# EAGLE board tappytap_6x6_connopposite (EAGLE 7.3.0)
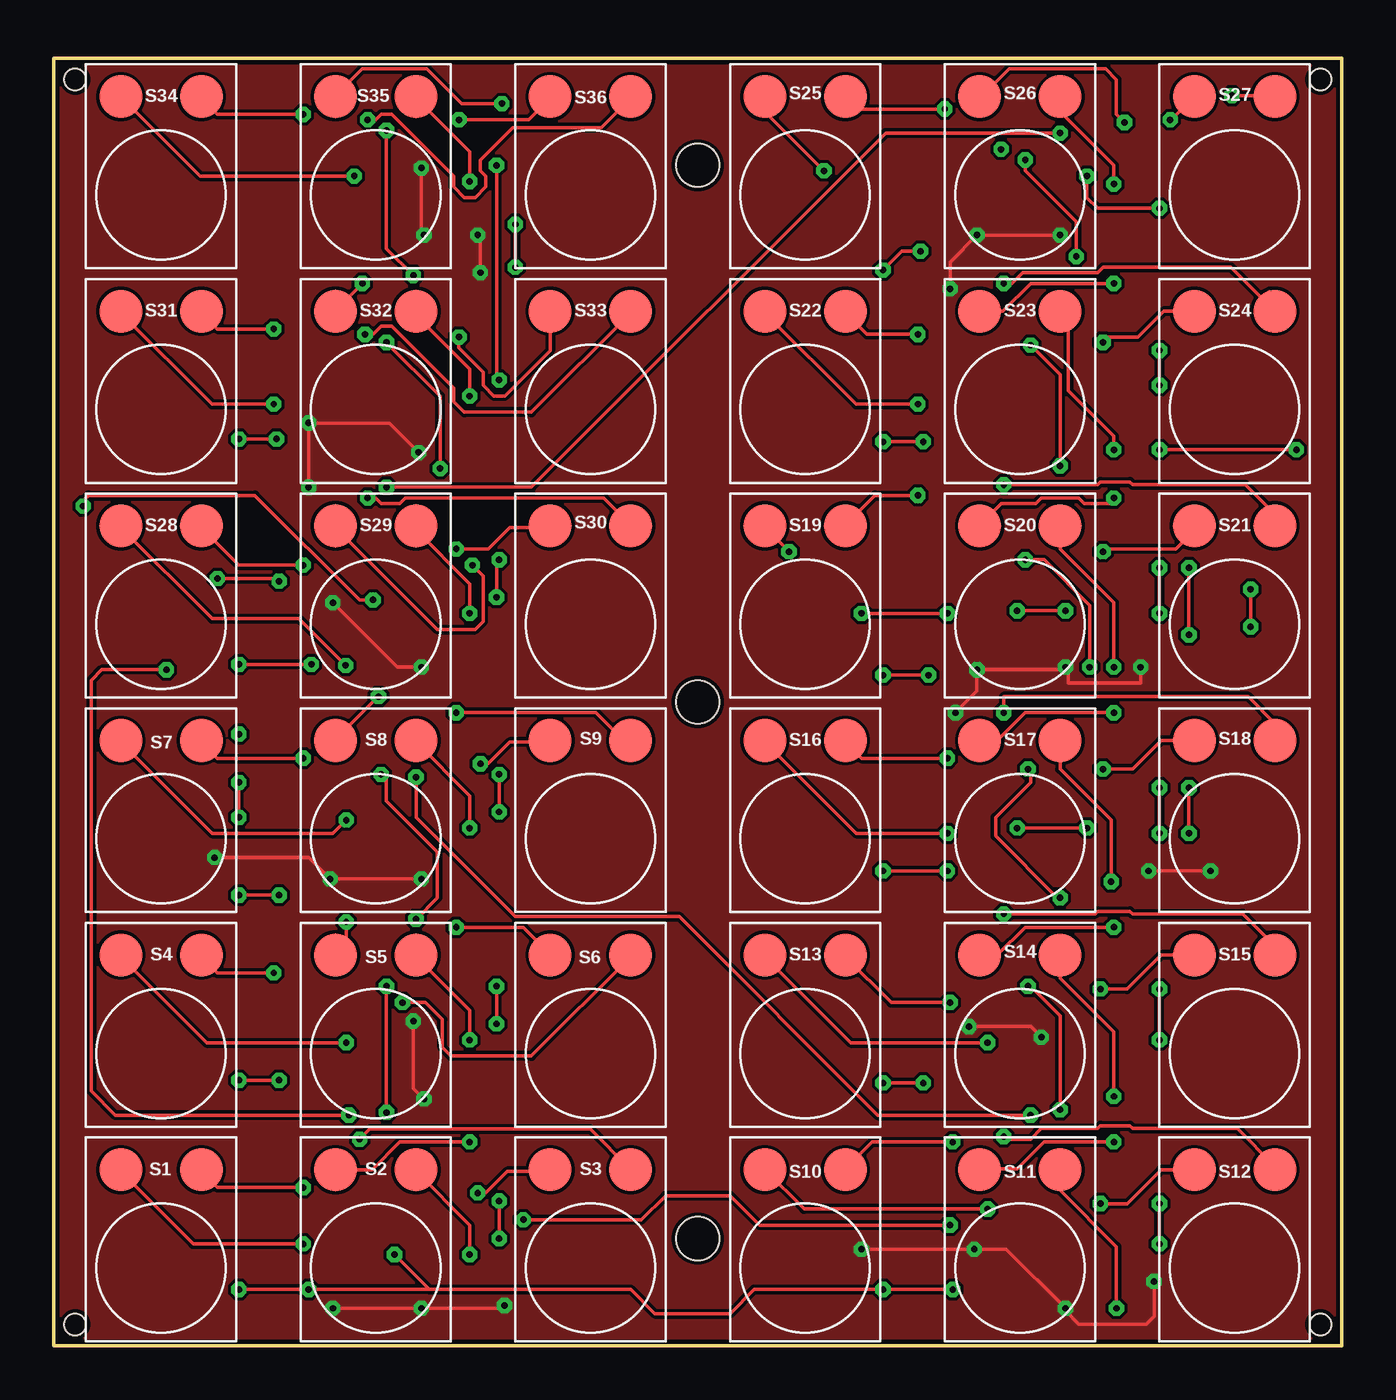
[diagram p0: board, top side]
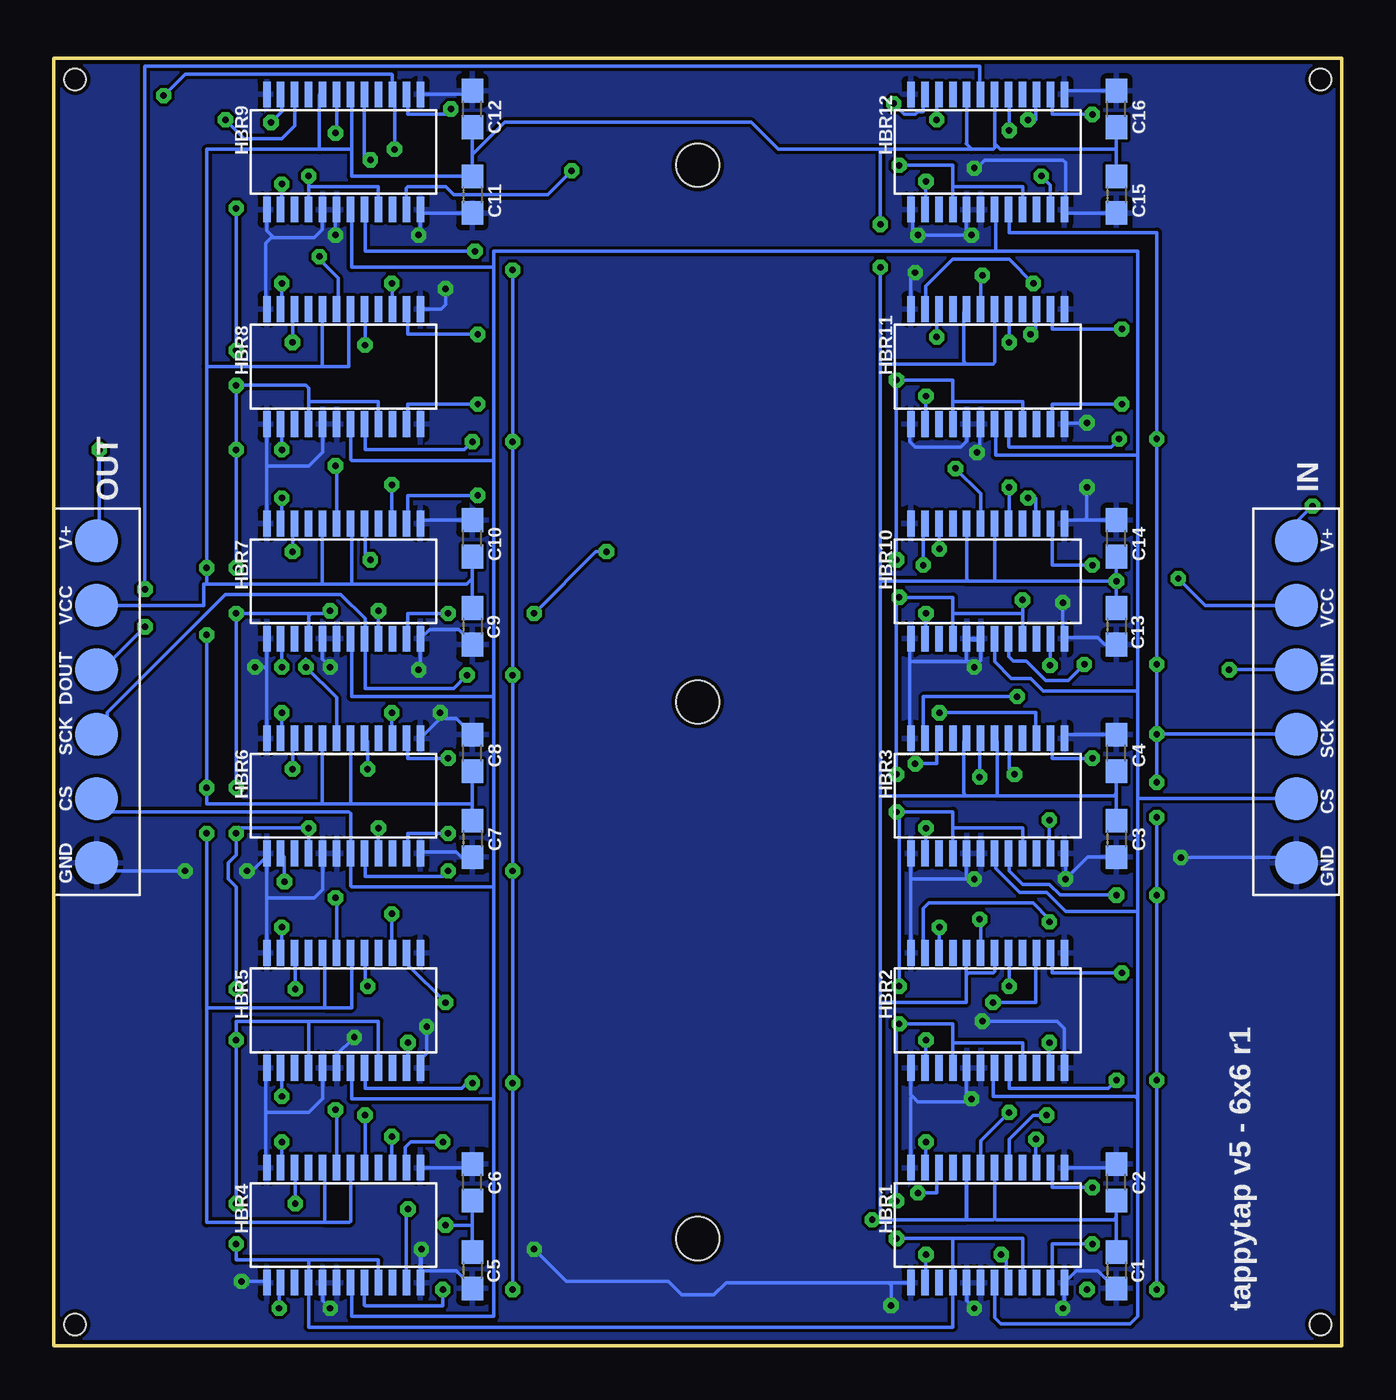
[diagram p1: board, bottom side, seen from below]

Size 60 x 60 mm. Coordinates in mm from the lower left corner, seen from the top.
Outline: 0,0 0,60 60,60 60,0 0,0
Copper layers (1*16): Top 0.035mm / dielectric 1.6mm / Bottom 0.035mm
Design rules "PCBWay *": minimum track width 6mil, minimum drill 0.3mm, track to track 6mil, track to pad 6mil, pad to pad 6mil, via to via 6mil, smd to smd 6mil, copper to edge 8mil, drill to drill 8mil, minimum pad ring 8mil, minimum via ring 8mil, stop-mask expansion 4mil, vias tented up to drill 25mil, thermal gap 10mil
Holes 2 mm at 30,55 30,30 30,5
Holes 1 mm at 1,59 1,1 59,1 59,59

## Footprints (pad centres in the part's own frame; a part is rotated, then mirrored left to right if it is on the bottom)
C0603 = smd 1.1 x 1: 1 -0.85,0; 2 0.85,0
SSOP-24 = smd 1.2 x 0.35: 1 -2.68,3.575; 2 -2.68,2.925; 3 -2.68,2.275; 4 -2.68,1.625; 5 -2.68,0.975; 6 -2.68,0.325; 7 -2.68,-0.325; 8 -2.68,-0.975; 9 -2.68,-1.625; 10 -2.68,-2.275; 11 -2.68,-2.925; 12 -2.68,-3.575; 13 2.68,-3.575; 14 2.68,-2.925; 15 2.68,-2.275; 16 2.68,-1.625; 17 2.68,-0.975; 18 2.68,-0.325; 19 2.68,0.325; 20 2.68,0.975; 21 2.68,1.625; 22 2.68,2.275; 23 2.68,2.925; 24 2.68,3.575
TP6_2MM = smd 2 x 2: P$1 -7.5,0; P$2 -4.5,0; P$3 -1.5,0; P$4 1.5,0; P$5 4.5,0; P$6 7.5,0
TP_6MM_BIG_PAD = smd 2 x 2: P$1 -1.875,-4.58; P$2 1.875,-4.58

## Placement (x,y rotation side)
C1  10uF  [C0603]  10.5,3.52 270 bottom
C2  0.1uF  [C0603]  10.5,7.62 90 bottom
C3  10uF  [C0603]  10.5,23.62 270 bottom
C4  0.1uF  [C0603]  10.5,27.62 90 bottom
C5  10uF  [C0603]  40.5,3.52 270 bottom
C6  0.1uF  [C0603]  40.5,7.62 90 bottom
C7  10uF  [C0603]  40.5,23.62 270 bottom
C8  0.1uF  [C0603]  40.5,27.62 90 bottom
C9  10uF  [C0603]  40.5,33.52 270 bottom
C10  0.1uF  [C0603]  40.5,37.62 90 bottom
C11  10uF  [C0603]  40.5,53.62 270 bottom
C12  0.1uF  [C0603]  40.5,57.62 90 bottom
C13  10uF  [C0603]  10.5,33.52 270 bottom
C14  0.1uF  [C0603]  10.5,37.62 90 bottom
C15  10uF  [C0603]  10.5,53.62 270 bottom
C16  0.1uF  [C0603]  10.5,57.62 90 bottom
HBR1  NCV7718  [SSOP-24]  16.5,5.62 270 bottom
HBR2  NCV7718  [SSOP-24]  16.5,15.62 270 bottom
HBR3  NCV7718  [SSOP-24]  16.5,25.62 270 bottom
HBR4  NCV7718  [SSOP-24]  46.5,5.62 270 bottom
HBR5  NCV7718  [SSOP-24]  46.5,15.62 270 bottom
HBR6  NCV7718  [SSOP-24]  46.5,25.62 270 bottom
HBR7  NCV7718  [SSOP-24]  46.5,35.62 270 bottom
HBR8  NCV7718  [SSOP-24]  46.5,45.62 270 bottom
HBR9  NCV7718  [SSOP-24]  46.5,55.62 270 bottom
HBR10  NCV7718  [SSOP-24]  16.5,35.62 270 bottom
HBR11  NCV7718  [SSOP-24]  16.5,45.62 270 bottom
HBR12  NCV7718  [SSOP-24]  16.5,55.62 270 bottom
IN  TP6  [TP6_2MM]  2.12,30 90 bottom
OUT  TP6  [TP6_2MM]  58,30 270 bottom
S1  TP_6MM_BIG_PAD  [TP_6MM_BIG_PAD]  5,3.62 180 top
S2  TP_6MM_BIG_PAD  [TP_6MM_BIG_PAD]  15,3.62 180 top
S3  TP_6MM_BIG_PAD  [TP_6MM_BIG_PAD]  25,3.62 180 top
S4  TP_6MM_BIG_PAD  [TP_6MM_BIG_PAD]  5,13.62 180 top
S5  TP_6MM_BIG_PAD  [TP_6MM_BIG_PAD]  15,13.62 180 top
S6  TP_6MM_BIG_PAD  [TP_6MM_BIG_PAD]  25,13.62 180 top
S7  TP_6MM_BIG_PAD  [TP_6MM_BIG_PAD]  5,23.62 180 top
S8  TP_6MM_BIG_PAD  [TP_6MM_BIG_PAD]  15,23.62 180 top
S9  TP_6MM_BIG_PAD  [TP_6MM_BIG_PAD]  25,23.62 180 top
S10  TP_6MM_BIG_PAD  [TP_6MM_BIG_PAD]  35,3.62 180 top
S11  TP_6MM_BIG_PAD  [TP_6MM_BIG_PAD]  45,3.62 180 top
S12  TP_6MM_BIG_PAD  [TP_6MM_BIG_PAD]  55,3.62 180 top
S13  TP_6MM_BIG_PAD  [TP_6MM_BIG_PAD]  35,13.62 180 top
S14  TP_6MM_BIG_PAD  [TP_6MM_BIG_PAD]  45,13.62 180 top
S15  TP_6MM_BIG_PAD  [TP_6MM_BIG_PAD]  55,13.62 180 top
S16  TP_6MM_BIG_PAD  [TP_6MM_BIG_PAD]  35,23.62 180 top
S17  TP_6MM_BIG_PAD  [TP_6MM_BIG_PAD]  45,23.62 180 top
S18  TP_6MM_BIG_PAD  [TP_6MM_BIG_PAD]  55,23.62 180 top
S19  TP_6MM_BIG_PAD  [TP_6MM_BIG_PAD]  35,33.62 180 top
S20  TP_6MM_BIG_PAD  [TP_6MM_BIG_PAD]  45,33.62 180 top
S21  TP_6MM_BIG_PAD  [TP_6MM_BIG_PAD]  55,33.62 180 top
S22  TP_6MM_BIG_PAD  [TP_6MM_BIG_PAD]  35,43.62 180 top
S23  TP_6MM_BIG_PAD  [TP_6MM_BIG_PAD]  45,43.62 180 top
S24  TP_6MM_BIG_PAD  [TP_6MM_BIG_PAD]  55,43.62 180 top
S25  TP_6MM_BIG_PAD  [TP_6MM_BIG_PAD]  35,53.62 180 top
S26  TP_6MM_BIG_PAD  [TP_6MM_BIG_PAD]  45,53.62 180 top
S27  TP_6MM_BIG_PAD  [TP_6MM_BIG_PAD]  55,53.62 180 top
S28  TP_6MM_BIG_PAD  [TP_6MM_BIG_PAD]  5,33.62 180 top
S29  TP_6MM_BIG_PAD  [TP_6MM_BIG_PAD]  15,33.62 180 top
S30  TP_6MM_BIG_PAD  [TP_6MM_BIG_PAD]  25,33.62 180 top
S31  TP_6MM_BIG_PAD  [TP_6MM_BIG_PAD]  5,43.62 180 top
S32  TP_6MM_BIG_PAD  [TP_6MM_BIG_PAD]  15,43.62 180 top
S33  TP_6MM_BIG_PAD  [TP_6MM_BIG_PAD]  25,43.62 180 top
S34  TP_6MM_BIG_PAD  [TP_6MM_BIG_PAD]  5,53.62 180 top
S35  TP_6MM_BIG_PAD  [TP_6MM_BIG_PAD]  15,53.62 180 top
S36  TP_6MM_BIG_PAD  [TP_6MM_BIG_PAD]  25,53.62 180 top

## Library data of the parts
C1-C16 = rcl
HBR1-HBR12 IN OUT = Sparky
S1-S36 = tom-tap

## Nets
+5V [usbvcc]: C1.1 C2.1 C3.1 C4.1 C5.1 C6.1 C7.1 C8.1 C9.1 C10.1 C11.1 C12.1 C13.1 C14.1 C15.1 C16.1 HBR1.6 HBR1.8 HBR2.6 HBR2.8 HBR3.6 HBR3.8 HBR4.6 HBR4.8 HBR5.6 HBR5.8 HBR6.6 HBR6.8 HBR7.6 HBR7.8 HBR8.6 HBR8.8 HBR9.6 HBR9.8 HBR10.6 HBR10.8 HBR11.6 HBR11.8 HBR12.6 HBR12.8 IN.P$5 OUT.P$2
GND [gnd]: C1.2 C2.2 C3.2 C4.2 C5.2 C6.2 C7.2 C8.2 C9.2 C10.2 C11.2 C12.2 C13.2 C14.2 C15.2 C16.2 HBR1.1 HBR1.12 HBR1.13 HBR1.17 HBR1.18 HBR1.24 HBR2.1 HBR2.12 HBR2.13 HBR2.17 HBR2.18 HBR2.24 HBR3.1 HBR3.12 HBR3.13 HBR3.17 HBR3.18 HBR3.24 HBR4.1 HBR4.12 HBR4.13 HBR4.17 HBR4.18 HBR4.24 HBR5.1 HBR5.12 HBR5.13 HBR5.17 HBR5.18 HBR5.24 HBR6.1 HBR6.12 HBR6.13 HBR6.17 HBR6.18 HBR6.24 HBR7.1 HBR7.12 HBR7.13 HBR7.17 HBR7.18 HBR7.24 HBR8.1 HBR8.12 HBR8.13 HBR8.17 HBR8.18 HBR8.24 HBR9.1 HBR9.12 HBR9.13 HBR9.17 HBR9.18 HBR9.24 HBR10.1 HBR10.12 HBR10.13 HBR10.17 HBR10.18 HBR10.24 HBR11.1 HBR11.12 HBR11.13 HBR11.17 HBR11.18 HBR11.24 HBR12.1 HBR12.12 HBR12.13 HBR12.17 HBR12.18 HBR12.24 IN.P$1 OUT.P$6
N$1: HBR4.7 HBR5.5
N$2: HBR5.7 HBR6.5
N$3: HBR7.7 HBR8.5
N$4: HBR8.7 HBR9.5
N$5: HBR10.7 HBR11.5
N$6: HBR11.7 HBR12.5
N$24: HBR1.7 HBR2.5
N$26: HBR2.7 HBR3.5
NCV_CS: HBR1.19 HBR2.19 HBR3.19 HBR4.19 HBR5.19 HBR6.19 HBR7.19 HBR8.19 HBR9.19 HBR10.19 HBR11.19 HBR12.19 IN.P$2 OUT.P$5
S1A: HBR1.2 S1.P$1
S1A1: HBR4.2 S10.P$1
S1A2: HBR7.2 S19.P$1
S1A3: HBR10.2 S28.P$1
S1B: HBR1.23 S1.P$2
S1B1: HBR4.23 S10.P$2
S1B2: HBR7.23 S19.P$2
S1B3: HBR10.23 S28.P$2
S2A: HBR1.14 S2.P$1
S2A1: HBR4.14 S11.P$1
S2A2: HBR7.14 S20.P$1
S2A3: HBR10.14 S29.P$1
S2B: HBR1.11 S2.P$2
S2B1: HBR4.11 S11.P$2
S2B2: HBR7.11 S20.P$2
S2B3: HBR10.11 S29.P$2
S3A: HBR1.3 S3.P$1
S3A1: HBR4.3 S12.P$1
S3A2: HBR7.3 S21.P$1
S3A3: HBR10.3 S30.P$1
S3B: HBR1.10 S3.P$2
S3B1: HBR4.10 S12.P$2
S3B2: HBR7.10 S21.P$2
S3B3: HBR10.10 S30.P$2
S4A: HBR2.2 S4.P$1
S4A1: HBR5.2 S13.P$1
S4A2: HBR8.2 S22.P$1
S4A3: HBR11.2 S31.P$1
S4B: HBR2.23 S4.P$2
S4B1: HBR5.23 S13.P$2
S4B2: HBR8.23 S22.P$2
S4B3: HBR11.23 S31.P$2
S5A: HBR2.14 S5.P$1
S5A1: HBR5.14 S14.P$1
S5A2: HBR8.14 S23.P$1
S5A3: HBR11.14 S32.P$1
S5B: HBR2.11 S5.P$2
S5B1: HBR5.11 S14.P$2
S5B2: HBR8.11 S23.P$2
S5B3: HBR11.11 S32.P$2
S6A: HBR2.3 S6.P$1
S6A1: HBR5.3 S15.P$1
S6A2: HBR8.3 S24.P$1
S6A3: HBR11.3 S33.P$1
S6B: HBR2.10 S6.P$2
S6B1: HBR5.10 S15.P$2
S6B2: HBR8.10 S24.P$2
S6B3: HBR11.10 S33.P$2
S7A: HBR3.2 S7.P$1
S7A1: HBR6.2 S16.P$1
S7A2: HBR9.2 S25.P$1
S7A3: HBR12.2 S34.P$1
S7B: HBR3.23 S7.P$2
S7B1: HBR6.23 S16.P$2
S7B2: HBR9.23 S25.P$2
S7B3: HBR12.23 S34.P$2
S8A: HBR3.14 S8.P$1
S8A1: HBR6.14 S17.P$1
S8A2: HBR9.14 S26.P$1
S8A3: HBR12.14 S35.P$1
S8B: HBR3.11 S8.P$2
S8B1: HBR6.11 S17.P$2
S8B2: HBR9.11 S26.P$2
S8B3: HBR12.11 S35.P$2
S9A: HBR3.3 S9.P$1
S9A1: HBR6.3 S18.P$1
S9A2: HBR9.3 S27.P$1
S9A3: HBR12.3 S36.P$1
S9B: HBR3.10 S9.P$2
S9B1: HBR6.10 S18.P$2
S9B2: HBR9.10 S27.P$2
S9B3: HBR12.10 S36.P$2
SCK: HBR1.20 HBR2.20 HBR3.20 HBR4.20 HBR5.20 HBR6.20 HBR7.20 HBR8.20 HBR9.20 HBR10.20 HBR11.20 HBR12.20 IN.P$3 OUT.P$4
SI_1: HBR1.5 IN.P$4
SO_1: HBR3.7 HBR4.5
SO_2: HBR6.7 HBR7.5
SO_3: HBR9.7 HBR10.5
SO_4: HBR12.7 OUT.P$3
V+: HBR1.16 HBR1.21 HBR2.16 HBR2.21 HBR3.16 HBR3.21 HBR4.16 HBR4.21 HBR5.16 HBR5.21 HBR6.16 HBR6.21 HBR7.16 HBR7.21 HBR8.16 HBR8.21 HBR9.16 HBR9.21 HBR10.16 HBR10.21 HBR11.16 HBR11.21 HBR12.16 HBR12.21 IN.P$6 OUT.P$1

## Tracks (layer width: path | path; a pad name or v marks a point on that pad's centre or on a via)
+5V  (via drill 0.3)
  Top 0.152: v7.62,35.75 10.38,35.75 v10.5,35.62 | v21.5,52.25 v21.5,50.25 | v52.88,36.25 v52.88,33.12 | v52.88,23.88 v52.88,26 | v41.75,5.62 32.88,5.62 31.5,7 28.5,7 27.38,5.88 v21.88,5.88
  Bottom 0.152: 10.5,55.75 C15.1 | v10.5,35.62 C13.1 | C4.1 10.5,25.75 | 10.5,25.75 C3.1 | C1.1 C2.1 10.5,6 10.62,5.88 16.1,5.88 16.18,5.95 | C6.1 40.5,5.62 | 40.5,5.62 C5.1 | 40.5,25.25 C7.1 | C10.1 40.5,35.75 | 40.5,35.75 C9.1 | C12.1 40.5,55.5 | 40.5,55.5 40.5,54.5 | 40.5,54.5 C11.1 40.52,54.5 | IN.P$5 6.38,34.5 v7.62,35.75 | v10.5,35.62 C14.1 | HBR10.6 16.18,35.7 16.25,35.62 | 17.38,35.62 16.25,35.62 | 16.25,35.62 v10.5,35.62 | 21.5,45.75 21.5,35.62 | 21.5,35.62 21.5,25.62 | 17.5,28.28 HBR3.8 17.62,28.16 17.62,25.75 17.5,25.62 | 16.12,25.62 10.62,25.62 10.5,25.75 | 16.12,25.62 16.05,25.68 16.05,28.18 HBR3.6 | 16.12,25.62 17.5,25.62 | 17.5,25.62 21.5,25.62 | 21.5,25.62 21.5,16 | 21.5,16 17.5,16 17.5,17.25 | 17.5,17.25 17.5,18.28 HBR2.8 | HBR1.6 16.18,5.95 | 16.18,5.95 16.25,5.88 17.5,5.88 | 17.5,5.88 17.5,8.28 HBR1.8 17.48,5.9 17.5,5.88 | 17.5,45.75 16.25,45.75 16.18,45.83 HBR11.6 | 17.5,45.75 17.62,45.88 17.62,48.16 HBR11.8 | 17.5,45.75 21.5,45.75 | HBR12.6 16.18,56 | 16.18,56 16.18,55.83 16.25,55.75 17.25,55.75 | 17.25,55.75 17.5,56 17.48,56.02 HBR12.8 | C16.1 10.5,55.75 | 10.5,55.75 15.93,55.75 16.18,56 | 17.25,55.75 21.5,55.75 | 21.5,55.75 v21.5,52.25 | v21.5,50.25 21.5,45.75 | OUT.P$2 53,34.5 53,35.5 52.88,35.5 | 47.5,35.5 46.12,35.5 | 46.12,35.5 40.75,35.5 40.5,35.75 | HBR7.6 46.12,38.26 46.12,35.5 | HBR7.8 47.5,38.28 47.5,35.5 | HBR8.6 46.25,48.23 46.25,45.62 47.5,45.62 | 47.5,45.62 52.88,45.62 | 52.88,45.62 v52.88,36.25 52.88,35.5 | HBR8.8 47.5,48.28 47.5,45.62 | HBR9.6 46.12,58.23 46.12,55.75 | HBR9.8 47.62,58.28 47.62,55.75 | 46.12,55.75 47.62,55.75 | 47.62,55.75 52.88,55.75 52.88,45.62 | 47.5,35.5 52.88,35.5 | v52.88,33.12 v52.88,26 52.88,25.25 47.5,25.25
  Bottom 0.152: HBR6.6 46.17,25.32 46.25,25.25 | HBR6.8 47.5,28.28 47.5,25.25 | C8.1 40.5,25.25 | 40.5,25.25 46.25,25.25 | 46.25,25.25 47.5,25.25 | HBR5.8 47.38,18.2 47.38,15.75 | 47.38,15.75 52.88,15.75 | 52.88,15.75 v52.88,23.88 | 47.38,15.75 46.12,15.75 46.12,18.25 HBR5.6 | HBR4.8 47.38,8.21 47.38,5.75 | 47.38,5.75 52.88,5.75 52.88,15.75 | 46.12,8.26 HBR4.6 46.17,5.8 46.23,5.75 47.38,5.75 | HBR2.6 16.18,17.45 16.25,17.38 17.38,17.38 17.5,17.25 | 40.5,54.5 46.12,54.5 46.12,55.75 | 40.5,5.62 v41.75,5.62 | 21.5,5.88 17.5,5.88 | 21.5,16 21.5,5.88 | 21.5,5.88 v21.88,5.88 | HBR10.8 17.48,35.73 | 17.48,35.73 17.38,35.62 | 17.48,35.73 17.48,35.65 17.5,35.62 | 17.38,35.62 21.5,35.62 | 21.5,55.75 26.25,55.75 27.5,57 39,57 40.5,55.5
GND  (via drill 0.3)
  Top 0.152: v37.62,4.5 v42.88,4.5 44.38,4.5 v47.12,1.75 47.12,1.62 47.75,1 50.88,1 51.25,1.38 v51.25,3 | v16.75,15.12 16.75,12 v17.25,11.5 | v17.12,54.88 17.12,51.88 v17.25,51.75 | v21,1.88 20.88,1.75 v17.12,1.75 v13,1.75 | v46.88,51.75 v43,51.75 41.75,50.5 v41.75,49.25 | v50.62,31.62 50.62,30.88 47.25,30.88 47.25,31.5 v47.12,31.62 47,31.5 v43,31.5 43,30.5 v42,29.5 | v51,22.12 v53.88,22.12 | v42.62,14.88 45.5,14.88 v46,14.38 | v17,41.62 15.62,43 v11.88,43 v11.88,40 | v19.88,50 19.88,51.5 v19.75,51.75 | v17.12,31.62 16,31.62 v13,34.62 | v17.12,21.75 v12.88,21.75 11.88,22.75 v7.5,22.75
  Bottom 0.152: 42.88,3.5 v42.88,4.5 42.92,4.45 HBR4.24 42.88,3 42.88,3.5 | v16.75,15.12 13.25,15.12 12.93,14.8 HBR2.24 | HBR2.13 20.07,11.7 20,11.62 | 20,11.62 19.75,11.38 17.38,11.38 v17.25,11.5 17.5,11.75 17.5,12.88 | 17.5,12.88 17.38,12.88 | HBR12.17 17.5,52.92 17.5,52 v17.25,51.75 v19.75,51.75 19.88,51.62 20,51.75 20,52.87 HBR12.13 | v17.12,54.88 17,54.88 16.62,55.25 13,55.25 12.88,55.12 12.88,52.99 HBR12.24 12.76,52.77 C15.2 | HBR1.13 21.12,2.94 | HBR4.17 47.48,2.1 v47.12,1.75 | v51.25,3 50.13,3 HBR4.13 | HBR1.17 17.48,2.1 v17.12,1.75 | v21,1.88 21,2.82 21.12,2.94 | HBR1.12 20.07,11.55 20,11.62 | C5.2 40.5,2.75 41.25,3.5 42.88,3.5 | v43,51.75 42.92,51.83 HBR9.24 42.76,52.77 C11.2 | v46.88,51.75 46.88,52.77 HBR9.18 | HBR9.13 50.08,51.95 49.75,51.62 | 49.75,51.62 47.88,51.62 47.5,52 47.5,52.92 HBR9.17 | 49.75,51.62 49.88,51.62 50.12,51.38 50.12,48.35 HBR8.12 | HBR9.1 40.67,58.3 C12.2 | HBR8.1 41.95,48.3 41.75,48.5 v41.75,49.25 | C10.2 42.76,38.48 HBR7.1 | C9.2 40.5,32.75 41.12,33.38 42.49,33.38 HBR7.24 42.92,31.57 v43,31.5 | HBR8.13 50.08,41 | 50.08,41 HBR7.12 | v47.12,31.62 47.5,32 47.5,32.92 HBR7.17 | HBR8.17 47.48,41.65 48.12,41 50.08,41 | 50.08,31.5 HBR6.12 | HBR7.13 50.08,31.5 | v50.62,31.62 50.2,31.62 50.08,31.5 | 50.08,20.88 HBR6.13 50.08,22.8 50.75,22.12 v51,22.12 | 50.08,20.88 HBR5.12 | HBR6.17 47.48,21.27 47.88,20.88 50.08,20.88 | HBR5.17 47.48,11.53 48.12,10.88 50.12,10.88 | 50.12,10.88 50.12,12.89 HBR5.13 | HBR4.1 40.67,8.3 C6.2 | 50.12,10.88 50.12,8.36 HBR4.12 | v53.88,22.12 57.62,22.12 OUT.P$6 | C7.2 41.02,22.77 41.25,23 42.87,23 HBR6.24 | v42,29.5 42,29.23 | 42,29.23 HBR6.1 | HBR5.24 42.92,13.32 42.62,13.62 v42.62,14.88
  Bottom 0.152: v46,14.38 46.88,13.5 46.88,12.99 HBR5.18 | v17,41.62 16.88,41.75 16.88,42.9 HBR11.18 | C16.2 12.76,58.48 HBR12.1 | HBR11.12 20.07,49.8 v19.88,50 | C14.2 12,38.48 | 12,38.48 12.76,38.48 HBR10.1 | C13.2 11.05,32.67 11.38,33 12.87,33 HBR10.24 13,33.02 v13,34.62 | HBR10.17 16.95,32.95 16.88,32.88 17.25,32.88 17.38,33 17.5,32.88 17.5,31.88 | 17.5,31.88 20.12,31.88 | 20.12,31.88 20.12,32.9 HBR10.13 | HBR10.18 16.82,31.93 16.88,31.88 17.25,31.88 | 17.5,31.88 17.25,31.88 | 17.25,31.88 17.25,31.75 v17.12,31.62 | C4.2 12.76,28.48 HBR3.1 | 17.5,12.88 17.5,12.92 HBR2.17 | HBR3.13 20.07,21.75 | 20.07,21.75 HBR2.12 | 17.38,23 17.5,22.88 | 12.87,23 HBR3.24 12.86,22.88 12.86,21.77 v12.88,21.75 11.85,22.77 C3.2 | IN.P$1 2.62,22.5 2.88,22.75 v7.5,22.75 | 17.5,21.75 20.07,21.75 | v17.12,21.75 17.5,21.75 | 17.5,21.75 17.5,22.88 | 17.5,22.88 17.5,22.92 HBR3.17 | HBR1.1 10.67,8.3 C2.2 | v13,1.75 12.93,1.7 HBR1.24 12.37,3.5 11.38,3.5 10.55,2.67 C1.2 | v11.88,40 11.88,38.6 12,38.48 | v11.88,43 12.87,43 HBR11.24 | HBR11.17 17.48,42.15 17.75,41.88 19.88,41.88 20.12,42.12 20.12,42.9 HBR11.13 | 20.12,31.88 20.12,28.36 HBR3.12 | 42,29.23 41.26,29.23 C8.2 | 21.12,2.94 28.68,2.94 29.25,2.38 30.75,2.38 31.38,3 36.12,3 v37.62,4.5
  pour Bottom: 0,60 0,0 60,0 60,60
  pour Top: 0,0 60,0 60,60 0,60
N$1  (via drill 0.3)
  Top 0.152: v46.88,11 46.88,15.38 45.5,16.75 v45.38,16.75
  Bottom 0.152: HBR4.7 46.83,10.95 v46.88,11 | HBR5.5 45.5,18.28 45.5,16.88 v45.38,16.75
N$2  (via drill 0.3)
  Top 0.152: v45.38,26.88 45.5,26.75 45.5,26.25 43.88,24.62 43.88,23.75 46.75,20.88 v46.88,20.88
  Bottom 0.152: HBR5.7 46.83,20.82 v46.88,20.88 | v45.38,26.88 45.38,28.16 HBR6.5
N$3  (via drill 0.3)
  Top 0.152: v46.88,41 46.88,45.25 v45.5,46.62
  Bottom 0.152: HBR7.7 46.83,40.95 v46.88,41 | v45.5,46.62 45.5,48.28 HBR8.5
N$4  (via drill 0.3)
  Top 0.152: v45.25,55.25 45.25,54.75 47.62,52.38 v47.62,50.75 47.62,50.62
  Bottom 0.152: HBR9.5 45.52,55.27 45.27,55.27 v45.25,55.25 | 46.88,48.35 HBR8.7 46.75,48.38 46.75,49.75 47.62,50.62 v47.62,50.75
N$5  (via drill 0.3)
  Top 0.152: v18,40.88 18,44.25 v15.5,46.75
  Bottom 0.152: v15.5,46.75 15.5,48.28 HBR11.5 | HBR10.7 16.82,39.7 v18,40.88
N$6  (via drill 0.3)
  Top 0.152: v16.75,49.88 15.5,51.12 v15.5,56.62
  Bottom 0.152: HBR11.7 16.82,49.8 v16.75,49.88 | v15.5,56.62 15.5,58.28 HBR12.5
N$24  (via drill 0.3)
  Top 0.152: v15.5,16.75 v15.5,10.88
  Bottom 0.152: HBR1.7 16.82,9.55 v15.5,10.88 | v15.5,16.75 15.5,18.28 HBR2.5
N$26  (via drill 0.3)
  Top 0.152: v15.25,26.62 15.5,26.62 15.5,25.38 17.88,23 17.88,20.88 v16.88,19.88
  Bottom 0.152: HBR2.7 16.82,19.82 v16.88,19.88 | v15.25,26.62 15.5,26.88 15.5,28.28 HBR3.5
NCV_CS
  Bottom 0.152: IN.P$2 9.5,25.5 | 9.5,25.5 9.5,20.25 | 9.5,20.25 9.5,11.5 | 9.5,11.5 9.5,1.38 9.85,1.02 15.9,1.02 16.18,1.3 HBR1.19 | HBR3.19 16.12,22.89 16.12,22.25 15,21.12 13.75,21.12 12.88,20.25 9.5,20.25 | 16.12,32.9 HBR10.19 16.18,31.88 15.4,31.1 14.5,31.1 13.9,30.5 9.5,30.5 | HBR11.19 16.12,42.9 16.12,41.5 9.5,41.5 | HBR12.19 16.12,52.9 16.12,51 | 16.12,51 39.5,51 39.5,50.25 | 16.12,51 9.5,51 9.5,41.5 | 9.5,41.5 9.5,30.5 | 9.5,30.5 9.5,25.5 | 39.5,50.25 39.5,41.25 | 39.5,41.25 46.12,41.25 46.17,41.3 HBR8.19 | HBR7.19 46.12,32.9 46.12,30.25 39.5,30.25 | 39.5,41.25 39.5,30.25 | 39.5,30.25 39.5,21.38 | 39.5,21.38 46.12,21.38 46.17,21.43 HBR6.19 46.17,24.8 46.25,24.88 57.38,24.88 OUT.P$5 | HBR5.19 46.12,12.89 46.12,11.5 39.5,11.5 | 39.5,21.38 39.5,11.5 | HBR4.19 46.12,2.9 46.12,1.38 39.5,1.38 39.5,11.5 | HBR2.19 16.25,12.87 16.25,11.62 9.62,11.62 9.5,11.5 | 39.5,50.25 46.12,50.25 46.12,52.9 HBR9.19
S1A  (via drill 0.3)
  Top 0.152: v11.62,7.38 7.62,7.38 6.88,8.12 S1.P$1
  Bottom 0.152: v11.62,7.38 13.5,7.38 13.5,8.25 HBR1.2
S1A1  (via drill 0.3)
  Top 0.152: v41.88,9.5 38.12,9.5 36.88,8.25 S10.P$1
  Bottom 0.152: HBR4.2 43.62,8.38 43.62,9.25 43.38,9.5 v41.88,9.5
S1A2  (via drill 0.3)
  Top 0.152: v40.25,39.62 38.25,39.62 36.88,38.25 S19.P$1
  Bottom 0.152: v40.25,39.62 43.5,39.62 43.5,38.38 HBR7.2
S1A3  (via drill 0.3)
  Top 0.152: v11.62,36.38 8.62,36.38 6.88,38.12 S28.P$1
  Bottom 0.152: v11.62,36.38 13.5,36.38 13.5,38.25 HBR10.2
S1B  (via drill 0.3)
  Top 0.152: v11.62,4.75 6.5,4.75 3.12,8.12 S1.P$2
  Bottom 0.152: v11.62,4.75 13.5,4.75 13.5,3 HBR1.23
S1B1  (via drill 0.3)
  Top 0.152: v43.5,6.38 34.95,6.38 S10.P$2
  Bottom 0.152: HBR4.23 43.58,6.3 v43.5,6.38
S1B2  (via drill 0.3)
  Top 0.152: v37.62,34.12 v41.62,34.12 | v34.25,37 33.12,38.12 S19.P$2
  Bottom 0.152: v41.62,34.12 43.5,34.12 43.5,33 HBR7.23 | v37.62,34.12 34.75,37 v34.25,37
S1B3  (via drill 0.3)
  Top 0.152: S28.P$2 3.12,38.12 7.38,33.88 11.43,33.88 v13.6,31.7
  Bottom 0.152: 13.5,33 HBR10.23 13.57,31.73 v13.6,31.7
S2A  (via drill 0.3)
  Top 0.152: v19.38,4.25 19.38,5.62 16.88,8.12 S2.P$1
  Bottom 0.152: v19.38,4.25 19.38,3 HBR1.14
S2A1  (via drill 0.3)
  Top 0.152: S11.P$1 46.88,7.25 49.5,4.62 v49.5,1.75
  Bottom 0.152: 49.38,3 HBR4.14 49.5,2.87 v49.5,1.75
S2A2  (via drill 0.3)
  Top 0.152: S20.P$1 46.88,37.12 49.38,34.62 v49.38,31.62
  Bottom 0.152: v49.38,31.62 49.38,32.9 HBR7.14
S2A3  (via drill 0.3)
  Top 0.152: v19.38,34.12 19.38,35.5 16.88,38 S29.P$1
  Bottom 0.152: v19.38,34.12 19.38,33 HBR10.14
S2B  (via drill 0.3)
  Top 0.152: S2.P$2 14.83,8.21 16.12,9.5 v19.38,9.5
  Bottom 0.152: v19.38,9.5 19.38,8.36 HBR1.11
S2B1  (via drill 0.3)
  Top 0.152: v49.38,9.5 46.12,9.5 44.88,8.25 43.12,8.25 S11.P$2
  Bottom 0.152: v49.38,9.5 49.38,8.38 HBR4.11
S2B2  (via drill 0.3)
  Top 0.152: S20.P$2 43.12,38.25 44.12,39.25 45.75,39.25 46,39.5 47.75,39.5 48,39.25 49.25,39.25 49.25,39.38 v49.38,39.5
  Bottom 0.152: v49.38,39.5 49.38,38.35 HBR7.11
S2B3  (via drill 0.3)
  Top 0.152: S29.P$2 13.12,38.12 17.88,33.38 19.62,33.38 20,33.75 20,35.88 v19.5,36.38
  Bottom 0.152: v19.5,36.38 19.5,38.25 HBR10.11
S3A  (via drill 0.3)
  Top 0.152: 26.88,8.38 S3.P$1 24.98,10.1 14.72,10.1 v14.25,9.62
  Bottom 0.152: v14.25,9.62 14.25,8.33 HBR1.3
S3A1  (via drill 0.3)
  Top 0.152: S12.P$1 56.88,8.38 55.12,10.12 50.25,10.12 50.12,10.25 48.75,10.25 48.62,10.12 46,10.12 45.5,9.62 44.38,9.62 v44.25,9.75
  Bottom 0.152: v44.25,9.75 44.25,8.33 HBR4.3
S3A2  (via drill 0.3)
  Top 0.152: S21.P$1 56.88,38.75 55.5,40.12 50.25,40.12 50.12,40.25 48.75,40.25 48.62,40.12 v44.25,40.12
  Bottom 0.152: v44.25,40.12 44.25,38.33 HBR7.3
S3A3  (via drill 0.3)
  Top 0.152: v14.62,39.5 15,39.5 15.25,39.25 16.12,39.25 16.38,39.5 25.62,39.5 26.88,38.25 S30.P$1
  Bottom 0.152: v14.62,39.5 14.25,39.5 14.25,38.38 HBR10.3
S3B  (via drill 0.3)
  Top 0.152: v19.75,7.12 20.12,7.12 21.12,8.12 23.12,8.12 S3.P$2
  Bottom 0.152: v19.75,7.12 18.88,7.12 18.88,8.25 HBR1.10
S3B1  (via drill 0.3)
  Top 0.152: S12.P$2 51.58,8.21 50,6.62 v48.75,6.62
  Bottom 0.152: v48.75,6.62 48.75,8.28 HBR4.10
S3B2  (via drill 0.3)
  Top 0.152: S21.P$2 53.12,38 52.25,37.12 49,37.12 v48.88,37
  Bottom 0.152: v48.88,37 48.88,38.2 HBR7.10
S3B3  (via drill 0.3)
  Top 0.152: v18.75,37.12 20.25,37.12 21.25,38.12 23.12,38.12 S30.P$2
  Bottom 0.152: v18.75,37.12 18.75,38.25 HBR10.10
S4A  (via drill 0.3)
  Top 0.152: v10.25,17.38 7.62,17.38 6.88,18.12 S4.P$1
  Bottom 0.152: v10.25,17.38 13.5,17.38 13.5,18.25 HBR2.2
S4A1  (via drill 0.3)
  Top 0.152: v41.75,16 39,16 36.88,18.12 S13.P$1
  Bottom 0.152: v41.75,16 43.5,17.75 43.5,18.25 HBR5.2
S4A2  (via drill 0.3)
  Top 0.152: v40.25,47.12 37.88,47.12 36.88,48.12 S22.P$1
  Bottom 0.152: v40.25,47.12 43.5,47.12 43.5,48.25 HBR8.2
S4A3  (via drill 0.3)
  Top 0.152: v10.25,47.38 7.62,47.38 6.88,48.12 S31.P$1
  Bottom 0.152: v10.25,47.38 13.5,47.38 13.5,48.25 HBR11.2
S4B  (via drill 0.3)
  Top 0.152: v13.62,14.12 7.12,14.12 3.12,18.12 S4.P$2
  Bottom 0.152: v13.62,14.12 13.62,13 HBR2.23
S4B1  (via drill 0.3)
  Top 0.152: v43.5,14.12 37.12,14.12 33.12,18.12 S13.P$2
  Bottom 0.152: v43.5,14.12 43.5,13 HBR5.23
S4B2  (via drill 0.3)
  Top 0.152: v40.25,43.88 37.38,43.88 33.12,48.12 S22.P$2
  Bottom 0.152: v40.25,43.88 43.5,43.88 43.5,43 HBR8.23
S4B3  (via drill 0.3)
  Top 0.152: v10.25,43.88 7.38,43.88 3.12,48.12 S31.P$2
  Bottom 0.152: v10.25,43.88 13.5,43.88 13.5,43 HBR11.23
S5A  (via drill 0.3)
  Top 0.152: v19.38,14.25 19.38,15.62 16.88,18.12 S5.P$1
  Bottom 0.152: v19.38,14.25 19.38,13 HBR2.14
S5A1  (via drill 0.3)
  Top 0.152: S14.P$1 46.88,17.12 49.38,14.62 v49.38,11.62
  Bottom 0.152: v49.38,11.62 49.38,12.89 HBR5.14
S5A2  (via drill 0.3)
  Top 0.152: v49.38,41.75 49.38,42.38 47.25,44.5 47.25,47.75 46.88,48.12 S23.P$1
  Bottom 0.152: v49.38,41.75 49.38,42.88 HBR8.14
S5A3  (via drill 0.3)
  Top 0.152: v19.38,44.25 19.38,45.5 16.88,48 S32.P$1
  Bottom 0.152: v19.38,44.25 19.38,43 HBR11.14
S5B  (via drill 0.3)
  Top 0.152: S5.P$2 13.12,18.25 13.62,18.75 v13.62,19.75
  Bottom 0.152: 19.5,18.38 HBR2.11 19.5,18.38 19.5,20.38 19.25,20.62 14.38,20.62 13.62,19.88 v13.62,19.75
S5B1  (via drill 0.3)
  Top 0.152: S14.P$2 43.95,18.2 45.25,19.5 v49.38,19.5
  Bottom 0.152: v49.38,19.5 49.38,18.36 HBR5.11
S5B2  (via drill 0.3)
  Top 0.152: S23.P$2 44.2,48.2 45.5,49.5 v49.38,49.5
  Bottom 0.152: v49.38,49.5 49.38,48.35 HBR8.11
S5B3  (via drill 0.3)
  Top 0.152: v14.38,49.5 13.12,48.25 S32.P$2
  Bottom 0.152: 19.38,48.38 HBR11.11 19.38,48.35 19.38,49.38 18.12,50.62 15.5,50.62 v14.38,49.5
S6A  (via drill 0.3)
  Top 0.152: S6.P$1 26.88,18.12 22.25,13.5 18.5,13.5 18.1,13.9 18.1,15.2 17.3,16 v16.25,16
  Bottom 0.152: v16.25,16 14.25,16 14.25,18.25 HBR2.3
S6A1  (via drill 0.3)
  Top 0.152: S15.P$1 56.88,18.62 55.38,20.12 50.25,20.12 50.12,20.25 48.62,20.25 48.5,20.12 v44.25,20.12
  Bottom 0.152: v44.25,20.12 44.25,18.45 HBR5.3
S6A2  (via drill 0.3)
  Top 0.152: 56.62,49.12 56.62,47.75 56.75,47.62 56.75,48.08 S24.P$1 54.83,50.25 48.88,50.25 48.62,50 45.12,50 44.62,49.5 v44.25,49.5
  Bottom 0.152: HBR8.3 44.23,49.48 v44.25,49.5
S6A3  (via drill 0.3)
  Top 0.152: v14.5,47.12 14.88,47.12 15.25,47.5 15.75,47.5 18.62,44.62 18.62,44 19.12,43.5 22.25,43.5 26.88,48.12 S33.P$1
  Bottom 0.152: v14.5,47.12 14.25,47.12 14.25,48.25 HBR11.3
S6B  (via drill 0.3)
  Top 0.152: v18.75,19.5 21.88,19.5 23.12,18.25 S6.P$2
  Bottom 0.152: v18.75,19.5 18.75,18.38 HBR2.10
S6B1  (via drill 0.3)
  Top 0.152: S15.P$2 51.58,18.2 50,16.62 v48.75,16.62
  Bottom 0.152: v48.75,16.62 48.75,18.28 HBR5.10
S6B2  (via drill 0.3)
  Top 0.152: S24.P$2 51.7,48.2 50.5,47 49.12,47 v48.88,46.75
  Bottom 0.152: v48.88,46.75 48.88,48.2 HBR8.10
S6B3  (via drill 0.3)
  Top 0.152: v18.88,47 18.88,46.5 20,45.38 20,44.75 20.5,44.25 21,44.25 23.12,46.38 S33.P$2
  Bottom 0.152: v18.88,47 18.88,48.25 HBR11.10
S7A  (via drill 0.3)
  Top 0.152: v11.62,27.38 7.62,27.38 6.88,28.12 S7.P$1
  Bottom 0.152: v11.62,27.38 13.5,27.38 13.5,28.25 HBR3.2
S7A1  (via drill 0.3)
  Top 0.152: v41.62,27.38 37.62,27.38 36.88,28.12 S16.P$1
  Bottom 0.152: v41.62,27.38 43.5,27.38 43.5,28.25 HBR6.2
S7A2  (via drill 0.3)
  Top 0.152: v41.5,57.62 37.38,57.62 36.88,58.12 S25.P$1
  Bottom 0.152: v41.5,57.62 41.75,57.38 43.5,57.38 43.5,58.25 HBR9.2
S7A3  (via drill 0.3)
  Top 0.152: v11.62,57.38 7.62,57.38 6.88,58.12 S34.P$1
  Bottom 0.152: v11.62,57.38 13.5,57.38 13.5,58.25 HBR12.2
S7B  (via drill 0.3)
  Top 0.152: S7.P$2 3.12,28.12 7.38,23.88 13,23.88 v13.62,24.5
  Bottom 0.152: 13.5,23 HBR3.23 13.62,23 v13.62,24.5
S7B1  (via drill 0.3)
  Top 0.152: v41.62,23.88 37.38,23.88 33.12,28.12 S16.P$2
  Bottom 0.152: v41.62,23.88 43.5,23.88 43.5,23 HBR6.23
S7B2  (via drill 0.3)
  Top 0.152: v35.88,54.75 33.12,57.5 S25.P$2
  Bottom 0.152: HBR9.23 43.58,53.92 43.5,54 41.75,54 41.38,53.62 37,53.62 v35.88,54.75
S7B3  (via drill 0.3)
  Top 0.152: S34.P$2 6.83,54.5 v14,54.5
  Bottom 0.152: HBR12.23 13.57,54.08 v14,54.5
S8A  (via drill 0.3)
  Top 0.152: v19.38,24.12 19.38,25.62 16.88,28.12 S8.P$1
  Bottom 0.152: v19.38,24.12 19.38,23 HBR3.14
S8A1  (via drill 0.3)
  Top 0.152: S17.P$1 46.88,26.88 49.25,24.5 v49.25,21.62
  Bottom 0.152: 49.5,22.87 HBR6.14 49.25,22.77 v49.25,21.62
S8A2  (via drill 0.3)
  Top 0.152: S26.P$1 46.88,57.5 49.38,55 v49.38,54.12
  Bottom 0.152: v49.38,54.12 49.38,53 HBR9.14
S8A3  (via drill 0.3)
  Top 0.152: v19.38,54.25 19.38,55.62 16.88,58.12 S35.P$1
  Bottom 0.152: v19.38,54.25 19.38,53 HBR12.14
S8B  (via drill 0.3)
  Top 0.152: v15.12,30.25 13.12,28.25 S8.P$2
  Bottom 0.152: v15.12,30.25 19.5,30.25 19.5,28.38 HBR3.11
S8B1  (via drill 0.3)
  Top 0.152: S17.P$2 43.95,28.2 45.25,29.5 v49.38,29.5
  Bottom 0.152: 49.5,28.23 HBR6.11 49.38,28.36 v49.38,29.5
S8B2  (via drill 0.3)
  Top 0.152: S26.P$2 43.12,58.25 43.25,58.25 44.5,59.5 49,59.5 49.5,59 49.5,57.38 v49.88,57
  Bottom 0.152: v49.88,57 49.38,57.5 49.38,58.26 HBR9.11
S8B3  (via drill 0.3)
  Top 0.152: v20.88,57.88 19,57.88 17.38,59.5 14.38,59.5 13.12,58.25 S35.P$2
  Bottom 0.152: v20.88,57.88 20.38,57.38 19.88,57.38 19.75,57.5 19.5,57.5 19.5,58.25 HBR12.11
S9A  (via drill 0.3)
  Top 0.152: v18.75,29.5 25.25,29.5 26.5,28.25 26.88,28.25 S9.P$1
  Bottom 0.152: v18.75,29.5 14.25,29.5 14.25,28.38 HBR3.3
S9A1  (via drill 0.3)
  Top 0.152: S18.P$1 56.88,29 55.62,30.25 44.25,30.25 v44.25,29.5
  Bottom 0.152: v44.25,29.5 44.25,28.33 HBR6.3
S9A2  (via drill 0.3)
  Top 0.152: 56.33,58.42 56.33,58.2 S27.P$1 56.83,58.25 v54.88,58.25
  Bottom 0.152: v44.12,55.75 44.12,58.2 HBR9.3 44.23,59.23 44.25,59.25 53.88,59.25 v54.88,58.25
S9A3  (via drill 0.3)
  Top 0.152: v14.62,57.12 15,57.12 15.25,57.38 15.75,57.38 18.62,54.5 18.62,54 19.12,53.5 19.62,53.5 20.12,54 20.12,54.5 19.88,54.75 19.88,55.25 21.38,56.75 25.5,56.75 26.88,58.12 S36.P$1
  Bottom 0.152: v14.62,57.12 14.25,57.12 14.25,58.25 HBR12.3
S9B  (via drill 0.3)
  Top 0.152: v19.88,27.12 20.25,27.12 21.25,28.12 23.12,28.12 S9.P$2
  Bottom 0.152: v19.88,27.12 18.88,27.12 18.88,28.25 HBR3.10
S9B1  (via drill 0.3)
  Top 0.152: S18.P$2 51.58,28.2 50.25,26.88 v48.88,26.88
  Bottom 0.152: v48.88,26.88 48.88,28.2 HBR6.10
S9B2  (via drill 0.3)
  Top 0.152: v52,57.12 52.05,57.12 S27.P$2
  Bottom 0.152: HBR9.10 48.77,56.85 49.38,56.25 51.12,56.25 v52,57.12
S9B3  (via drill 0.3)
  Top 0.152: v18.88,57.12 22.12,57.12 23.12,58.12 S36.P$2
  Bottom 0.152: v18.88,57.12 18.88,58.25 HBR12.10
SCK  (via drill 0.3)
  Top 0.152: v8.62,42.25 v10.38,42.25 | v8.62,2.62 v11.88,2.62 17.5,2.62 | v40.5,12.25 v38.62,12.25 | v12,31.75 v8.62,31.75 | v41.88,2.62 v38.62,2.62 32.62,2.62 31.5,1.5 28,1.5 26.88,2.62 17.5,2.62 | v41.62,22.12 v38.62,22.12 | v40.75,31.25 v38.62,31.25 | v40.5,42.12 v38.62,42.12 | v8.62,12.38 v10.5,12.38 | v8.62,24.62 v8.62,26.25 | v40.38,51 39.5,51 v38.62,50.12 | v10.5,21 v8.62,21 | v15.88,4.25 17.5,2.62
  Bottom 0.152: HBR12.20 15.5,52.92 15.5,51.88 8.62,51.88 v8.62,42.25 v8.62,31.75 v8.62,28.5 | v10.38,42.25 10.75,41.88 15.5,41.88 15.53,41.9 HBR11.20 | 15.5,32.92 HBR10.20 15.53,32.12 15.3,31.9 14.7,31.9 13.8,31 12.75,31 v12,31.75 | HBR2.20 15.5,12.92 15.5,12 10.88,12 v10.5,12.38 | 11.88,2.38 v11.88,2.62 | v41.88,2.62 41.88,1.88 45.5,1.88 45.52,1.9 HBR4.20 | HBR5.20 45.5,12.92 45.5,12 41,12 40.75,12.25 v40.5,12.25 | HBR6.20 45.5,22.92 45.5,21.88 41.88,21.88 v41.62,22.12 | HBR8.20 45.5,42.92 45.5,41.75 40.88,41.75 v40.5,42.12 | IN.P$3 v8.62,28.5 | 58,28.62 OUT.P$4 57.5,29 57.5,29.5 52,35 46.62,35 45.5,33.88 45.5,32.97 HBR7.20 45.5,32.92 45.5,30.62 41.38,30.62 v40.75,31.25 | v38.62,2.62 v38.62,12.25 v38.62,22.12 v38.62,31.25 v38.62,42.12 v38.62,50.12 | v8.62,2.62 v8.62,12.38 v8.62,21 v8.62,24.62 | v8.62,26.25 v8.62,28.5 | HBR9.20 45.5,52.92 45.5,51 v40.38,51 | v10.5,21 13.12,21 13.62,21.5 14.88,21.5 15.5,22.12 15.5,22.92 HBR3.20 | 15.62,3.04 15.62,2.85 HBR1.20 15.62,3.04 | v15.88,4.25 15.62,4 15.62,3.04
SI_1  (via drill 0.3)
  Top 0.152: v5.25,31.5 2.25,31.5 1.75,31 1.75,11.88 2.88,10.75 v13.75,10.75
  Bottom 0.152: IN.P$4 v5.25,31.5 | HBR1.5 15.5,8.33 15.5,9.62 14.38,10.75 v13.75,10.75
SO_1  (via drill 0.3)
  Top 0.152: v16.88,26.5 16.88,24.62 21.5,20 29.12,20 38.38,10.75 v45.5,10.75
  Bottom 0.152: HBR3.7 16.88,28.25 v16.88,26.5 | v45.5,10.75 45.5,8.33 HBR4.5
SO_2  (via drill 0.3)
  Top 0.152: v48.25,31.62 48.25,34.5 46.12,36.62 v45.25,36.62
  Bottom 0.152: HBR6.7 46.83,30.2 v48.25,31.62 48.25,32 | v45.25,36.62 45.5,36.88 45.5,38.28 HBR7.5
SO_3  (via drill 0.3)
  Top 0.152: v46.88,56.5 38.75,56.5 22.25,40 v15.5,40
  Bottom 0.152: HBR9.7 46.83,56.55 v46.88,56.5 | v15.5,40 15.5,38.33 HBR10.5
SO_4  (via drill 0.3)
  Top 0.152: v55.75,35.25 v55.75,33.5
  Bottom 0.152: HBR12.7 16.88,58.35 16.88,59.62 55.75,59.62 v55.75,35.25 | OUT.P$3 57.88,31.62 57.62,31.62 v55.75,33.5
V+  (via drill 0.3)
  Top 0.152: v44.88,34.25 v47.12,34.25 | v44.88,24.12 v48.12,24.12 48.12,24.38 | v20.62,15 v20.62,16.75 | v20.75,24.88 v20.75,26.62 | v20.75,36.62 20.62,36.5 v20.62,34.88 | v57.88,41.75 v51.5,41.75 | v20.75,6.75 v20.75,5 | v1.38,39.12 1.38,39.38 1.62,39.62 9.38,39.62 14.25,34.75 v14.88,34.75 | v51.5,53 48.62,53 48.12,53.5 v48.12,54.5 | v51.5,46.38 v51.5,44.75 | v51.5,36.25 v51.5,34.12 | v51.5,26 v51.5,23.88 | v51.5,14.25 v51.5,16.62 | v51.5,4.75 v51.5,6.62 | v20.75,45 20.62,45.12 v20.62,55
  Bottom 0.152: HBR7.21 v44.88,34.25 | HBR6.21 v44.88,24.12 | HBR6.16 v48.12,24.12 51.5,24.12 v51.5,23.88 51.5,22.88 51.88,22.5 51.88,21.75 51.5,21.38 v51.5,16.62 | HBR9.21 44.88,54 48.12,54 | 48.12,54 HBR9.16 | HBR8.21 44.88,44 48.12,44 | 48.12,44 HBR8.16 | HBR5.21 44.88,15.12 48.12,15.12 | 48.12,15.12 HBR5.16 | HBR4.21 44.88,4 48.12,4 | HBR12.21 14.88,54 18.12,54 HBR12.16 18.12,55 v20.62,55 | HBR11.21 14.88,44 18.12,44 | 18.12,44 HBR11.16 | HBR10.21 14.88,34.12 | 14.88,34.12 18.12,34.12 | 18.12,34.12 HBR10.16 | HBR3.21 14.88,24.12 18.12,24.12 | 18.12,24.12 HBR3.16 | HBR2.21 14.88,14.12 18.12,14.12 | 18.12,14.12 HBR2.16 | HBR1.21 14.88,5 18.12,5 | 18.12,5 HBR1.16 18.12,0.88 48.12,0.88 HBR4.16 48.12,4 | 18.12,5 v20.75,5 | 18.12,14.12 18.12,15 v20.62,15 20.75,14.88 v20.75,6.75 | 18.12,24.12 18.12,24.88 v20.75,24.88 20.62,24.75 v20.62,16.75 | 18.12,34.12 18.12,34.88 v20.62,34.88 20.75,34.75 v20.75,26.62 | v20.75,36.62 v20.75,45 18.12,45 18.12,44 | OUT.P$1 57.88,37.62 v57.88,41.75 | 2.12,37.38 IN.P$6 2.12,38.38 v1.38,39.12 | v14.88,34.75 14.88,34.12 | v48.12,54.5 48.12,54 | v51.5,53 v51.5,46.38 | 48.12,44 48.12,44.62 48.25,44.75 v51.5,44.75 v51.5,41.75 v51.5,36.25 | 48,34.12 v51.5,34.12 v51.5,26 | 48,34.12 47.25,34.12 v47.12,34.25 | HBR7.16 48.12,34 48,34.12 | v51.5,6.62 v51.5,14.25 51.5,15.12 48.12,15.12 | 48.12,4 51.5,4 v51.5,4.75

## Text on the board
bNames: V+ | V+ | VCC | VCC | DIN | DOUT | SCK | SCK | CS | CS | GND | GND | tappytap v5 - 6x6 r1